# Altium PCB Trofazni_invertor.PcbDoc
Units mm, origin at the board's own origin, x right, y up, seen from the top; angles counter-clockwise.
Board outline 160 x 100 mm, 2 copper layers (Top Layer, Bottom Layer); 57 components, 45 nets, 180 pads, 23 vias.
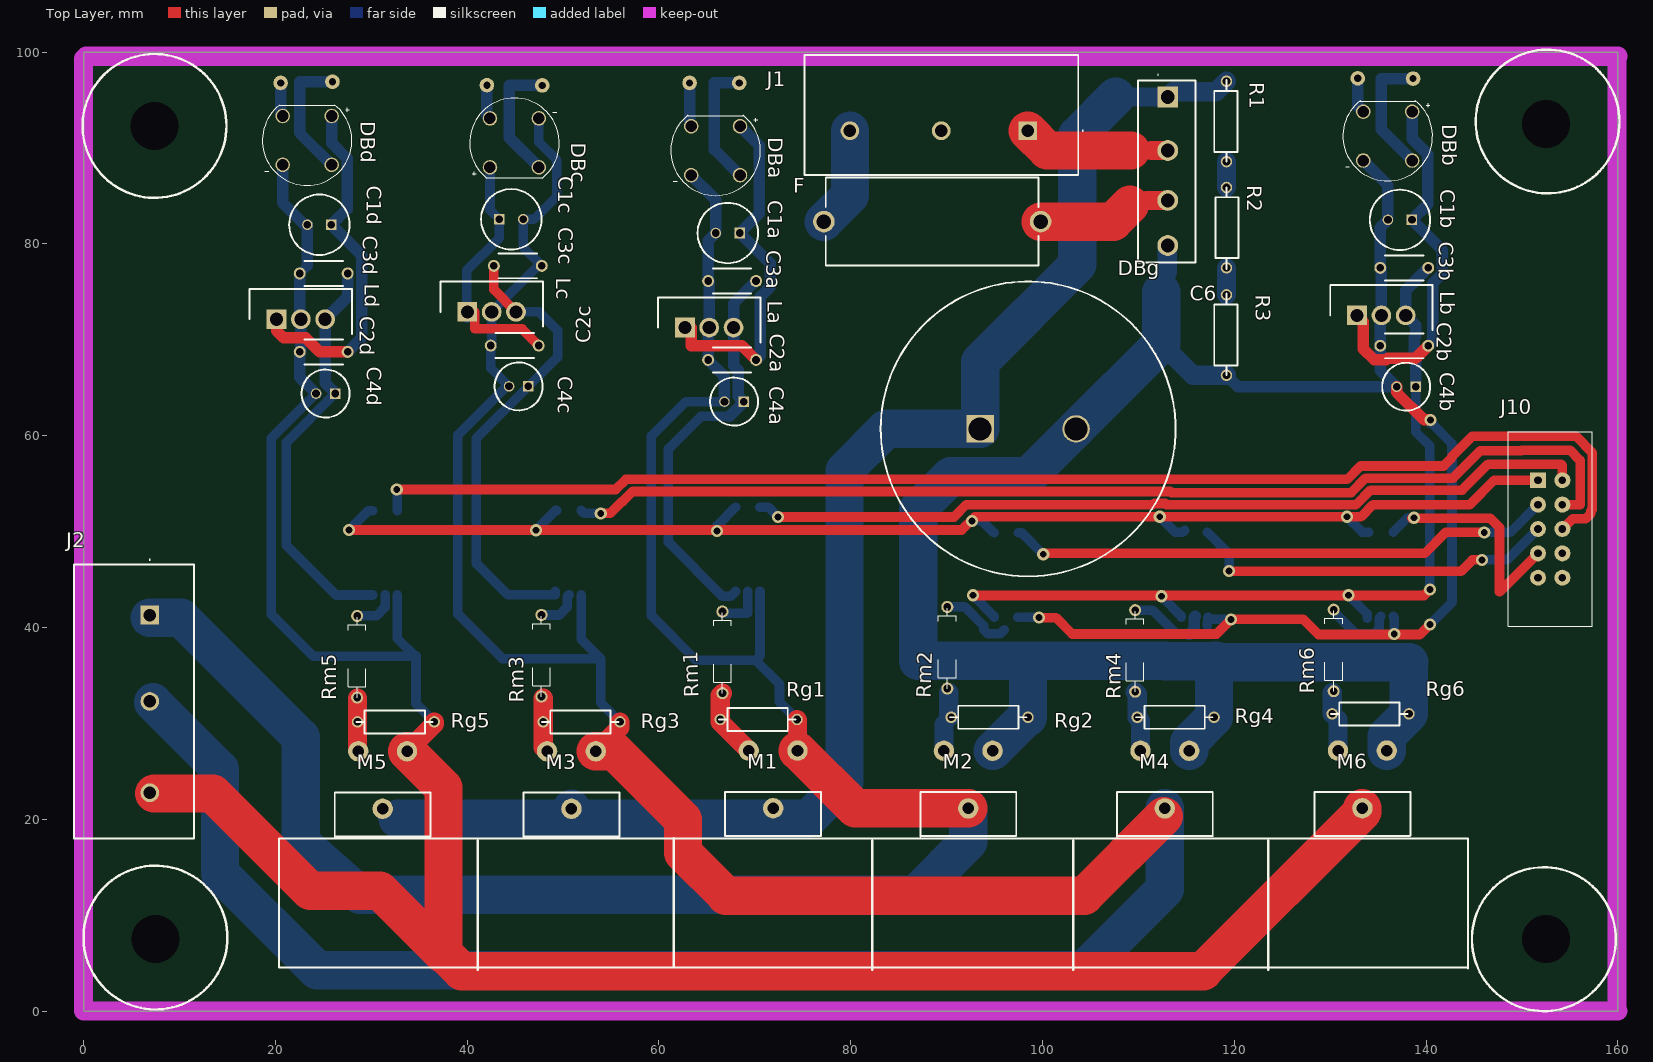
[diagram p0: Top Layer view]
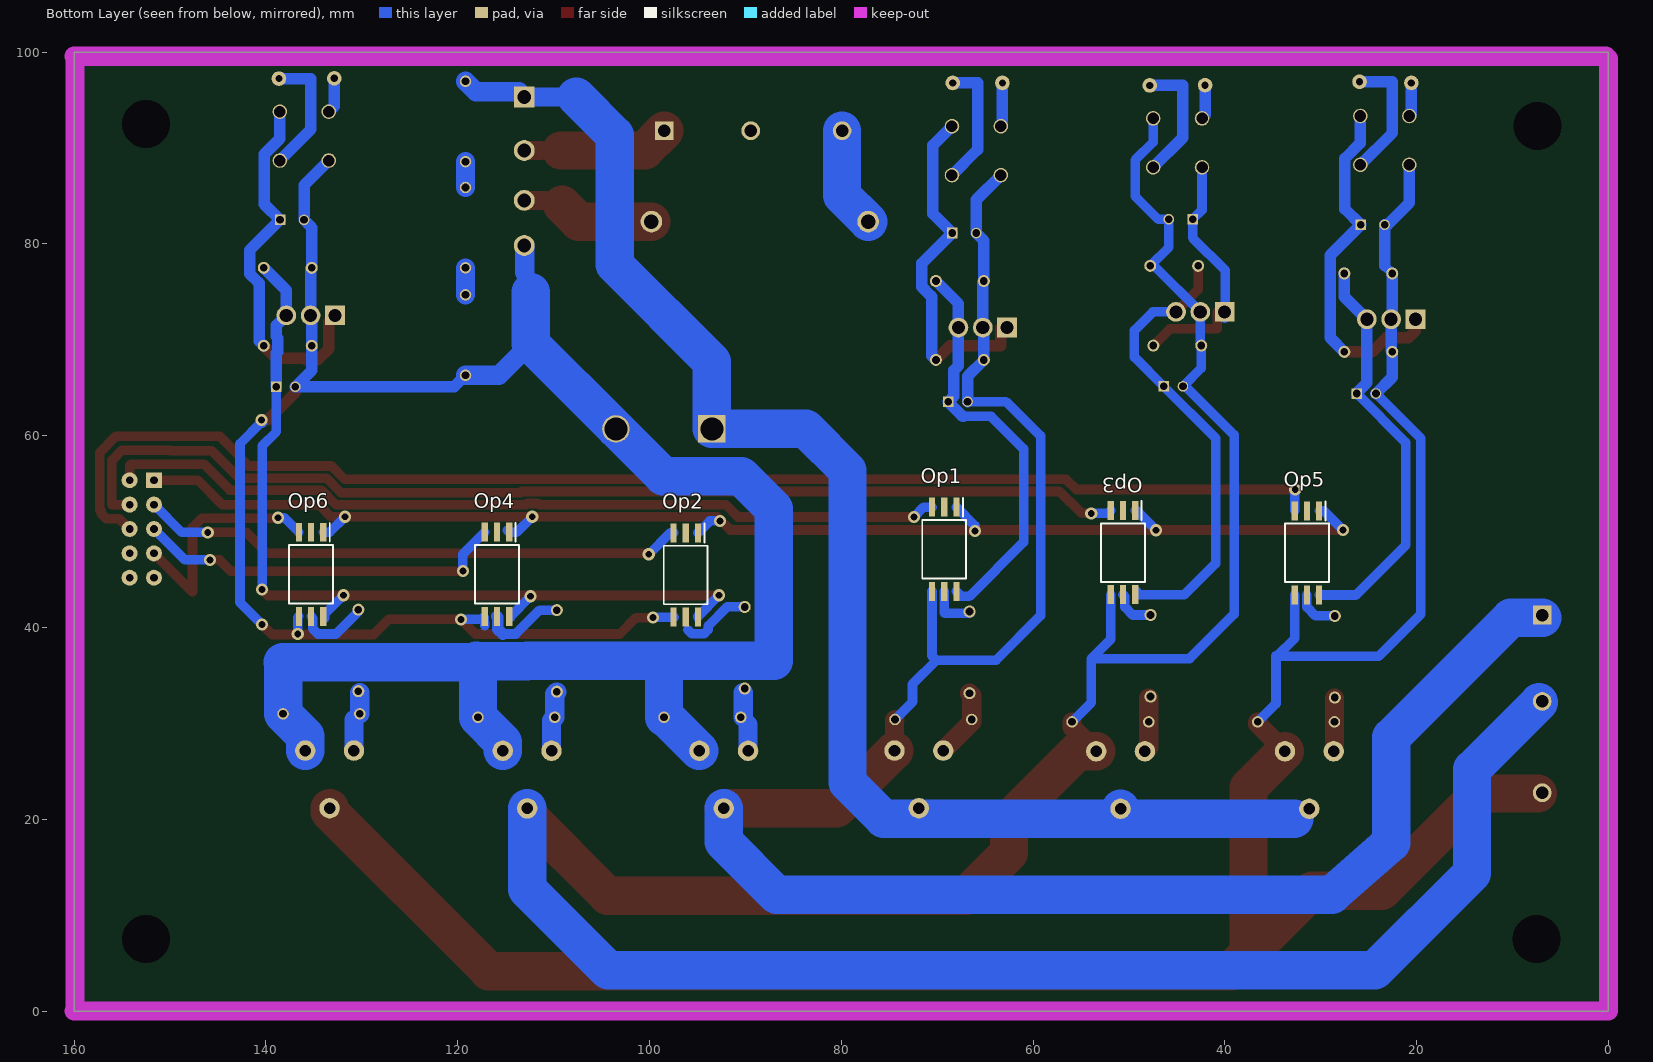
[diagram p1: Bottom Layer view, seen from below]
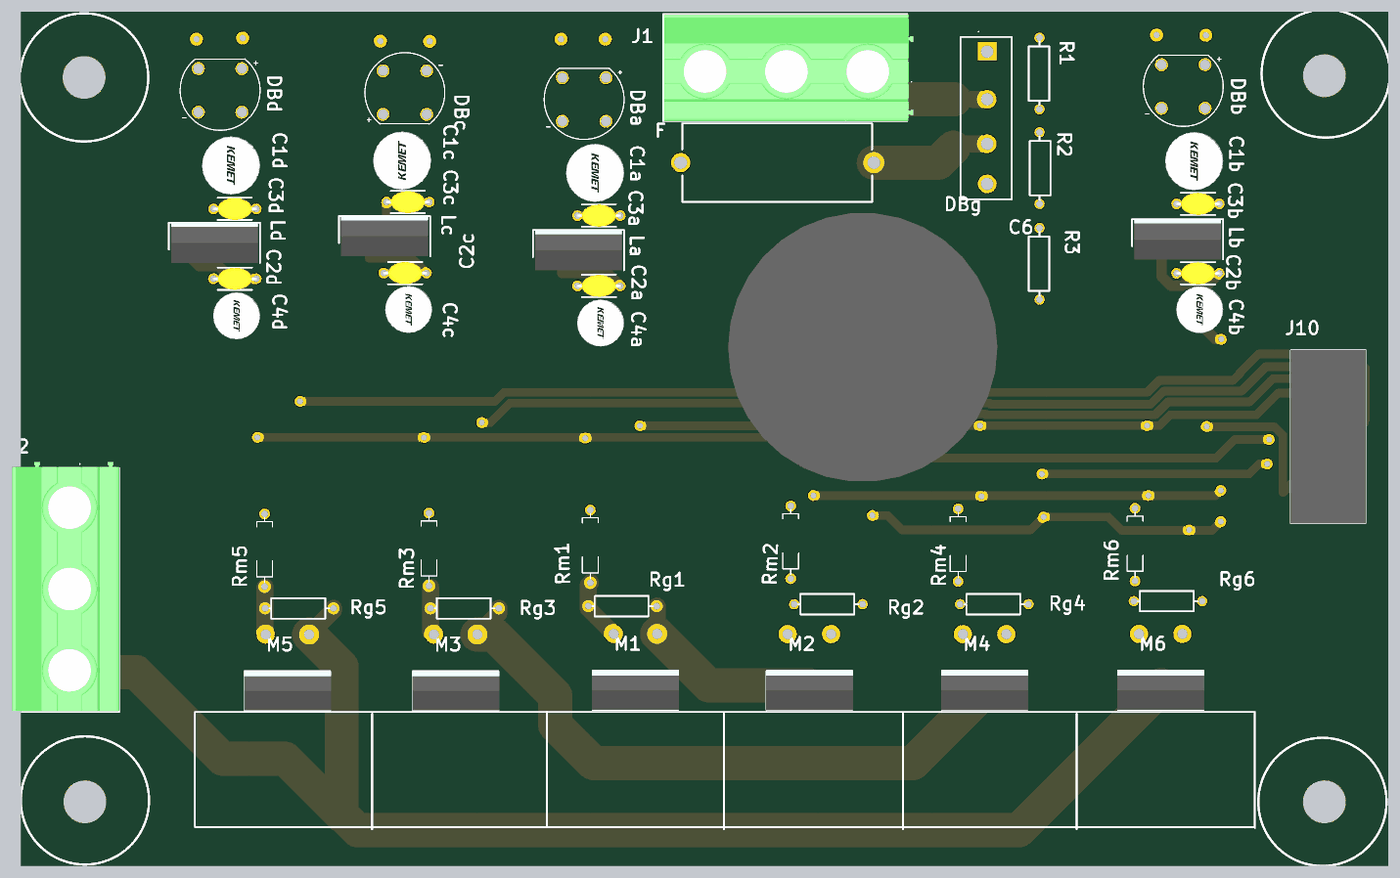
[diagram p2: 3D render of the assembled board from above, using the file's embedded part models]
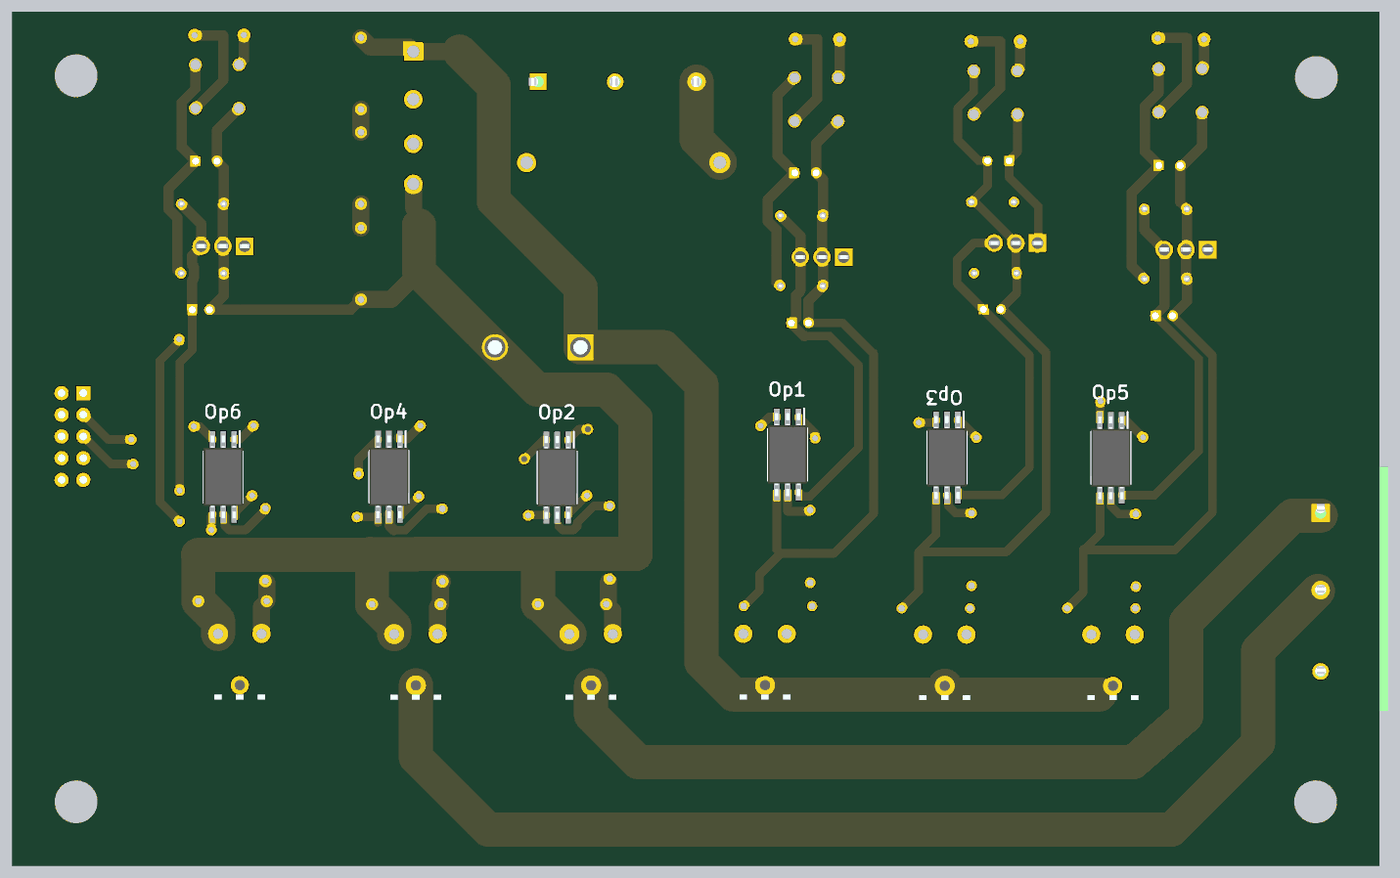
[diagram p3: 3D render of the assembled board from below, using the file's embedded part models]

## Layer stack, top to bottom
Top Solder: solder mask 0.0102, Solder Resist, Dk 3.5
Top Layer: signal copper 0.0356
Dielectric 1: dielectric 0.32, FR-4, Dk 4.8
Bottom Layer: signal copper 0.0356
Bottom Solder: solder mask 0.0102, Solder Resist, Dk 3.5

## Board outline
0,0 160,0 160,100 0,100

## Design rules (kind name [scope] priority, off if disabled: settings)
Clearance [All] p1: gap=0.254 ignorepadtopadclearanceinfootprint=FALSE except(0: Arc-Hole Track-Hole SMDPad-Hole THPad-Hole Via-Hole Fill-Hole Poly-Hole Region-Hole Text-Hole)
PolygonConnect [All] p1: connectstyle=Relief reliefconductorwidth=0.254 reliefentries=4 polygonreliefangle="90 Angle" airgapwidth=0.254
RoutingVias [All] p1: holewidth=0.711 width=1.27 viastyle="Through Hole" minholewidth=0.711 minwidth=1.27 maxholewidth=0.711 maxwidth=1.27
SolderMaskExpansion [All] p1: expansion=0.102
Width [All] p1: maxlimit=4 minlimit=0.99 preferedwidth=4 minimp=50.000000 maximp=50.000000 favimp=50.000000
30 further rules are at their usual default settings.

## Classes and differential pairs
component class Signalni_dio: C1a C1b C1c C1d C2a C2b C2c C2d C3a C3b C3c C3d C4a C4b C4c C4d DBa DBb DBc DBd J10 La Lb Lc Ld Op1 Op2 Op3 Op4 Op5 Op6
component class Energetski_dio: C6 DBg F J1 J2 M1 M2 M3 M4 M5 M6 R1 R2 R3 Rg1 Rg2 Rg3 Rg4 Rg5 Rg6 Rm1 Rm2 Rm3 Rm4 Rm5 Rm6

## Components (designator, comment, footprint, x,y, rotation, side; value= is the part's Value field where it differs from the comment)
C1a "100µF 30V" 20 68.427,81.128 r180 top
C1b "100µF 30V" 20 138.517,82.499 r180 top
C1c "100µF 30V" 20 43.353,82.56 r0 top
C1d "100µF 30V" 20 25.842,81.991 r180 top
C2a "0.1µF 50V" 8 67.626,67.894 r180 top
C2b "0.1µF 50V" 8 137.715,69.367 r180 top
C2c "0.1µF 50V" 8 44.958,69.393 r180 top
C2d "0.1µF 50V" 8 25.041,68.732 r180 top
C3a "0.1µF 50V" 8 67.626,76.124 r180 top
C3b "0.1µF 50V" 8 137.715,77.495 r180 top
C3c "0.1µF 50V" 8 45.284,77.709 r0 top
C3d "0.1µF 50V" 8 25.041,76.911 r180 top
C4a "33µF 30V" CAPPRD200W50D500H1250 68.827,63.551 r180 top
C4b "33µF 30V" CAPPRD200W50D500H1250 138.917,65.1 r180 top
C4c "33µF 30V" CAPPRD200W50D500H1250 46.369,65.136 r180 top
C4d "33µF 30V" CAPPRD200W50D500H1250 26.242,64.389 r180 top
C6 "470µF 400V" 6 93.497,60.706 r0 top
DBa "W04G-E4/51" 11 65.902,89.713 r0 top
DBb "W04G-E4/51" 11 135.992,91.237 r0 top
DBc "W04G-E4/51" 11 44.933,90.526 r180 top
DBd "W04G-E4/51" 11 23.317,90.78 r0 top
DBg "RS407GL-BP" 10 113.055,95.326 r270 top
F "696101000002" 696101000002 88.494,82.321 r0 top
J1 "1714984" 3 98.958,91.796 r180 top
J2 "1714984" 3 6.909,41.803 r270 top
J10 "SBH11-PBPC-D05-ST-BK" 4 151.663,55.347 r270 top
La "LM7818CT" 9 62.707,71.272 r0 top
Lb "LM7818CT" 9 132.797,72.542 r0 top
Lc "LM7818CT" 9 40.026,72.908 r0 top
Ld "LM7818CT" 9 20.122,72.136 r0 top
M1 "STP7NK40Z" 2 71.907,21.158 r0 top
M2 "STP7NK40Z" 2 92.253,21.133 r0 top
M3 "STP7NK40Z" 2 50.876,21.082 r0 top
M4 "STP7NK40Z" 2 112.751,21.133 r0 top
M5 "STP7NK40Z" 2 31.191,21.082 r0 top
M6 "STP7NK40Z" 2 133.35,21.158 r0 top
Op1 "TLP701(TP,F)" 1 69.266,48.152 r270 bottom
Op2 "TLP701(TP,F)" 1 96.215,45.466 r270 bottom
Op3 "TLP701(TP,F)" 1 50.622,47.803 r270 bottom
Op4 "TLP701(TP,F)" 1 115.9,45.542 r270 bottom
Op5 "TLP701(TP,F)" 1 31.445,47.771 r270 bottom
Op6 "TLP701(TP,F)" 1 135.28,45.536 r270 bottom
R1 "33kΩ" 18 119.177,97.079 r270 top
R2 "33kΩ" 18 119.177,77.368 r90 top
R3 "33kΩ" 18 119.177,74.803 r270 top
Rg1 "1kΩ" RESAD1590W60L630D240 66.269,30.404 r0 top
Rg2 "1kΩ" RESAD1590W60L630D240 90.348,30.632 r0 top
Rg3 "1kΩ" RESAD1590W60L630D240 47.803,30.15 r0 top
Rg4 "1kΩ" RESAD1590W60L630D240 109.753,30.632 r0 top
Rg5 "1kΩ" RESAD1590W60L630D240 28.448,30.15 r0 top
Rg6 "1kΩ" RESAD1590W60L630D240 130.073,30.988 r0 top
Rm1 "47Ω" 17 66.624,41.656 r270 top
Rm2 "47Ω" 17 90.068,42.139 r270 top
Rm3 "47Ω" 17 47.752,41.3 r270 top
Rm4 "47Ω" 17 109.652,41.808 r270 top
Rm5 "47Ω" 17 28.524,41.199 r270 top
Rm6 "47Ω" 17 130.353,41.859 r270 top

## Footprints (in the part's own frame and the unit in brackets; to place one, negate y for a bottom-side part, rotate by r counter-clockwise, add the part's x,y. Pads: shape width x height; smd on the part's side, far side on the other; paste and mask are expansions set on the pad)
1 [mm]
  rect 1.975x0.65 smd: 1(-4.388,1.27) 2(-4.388,0) 3(-4.388,-1.27) 4(4.388,-1.27) 5(4.388,0) 6(4.388,1.27)
  silkscreen extent -5.37,-2.29 3.05,2.29, body extent -4.85,-2.29 4.85,2.29, height 4.25
2 [mm]
  round 2.13 hole 1.2: 1(-2.54,6) 2(0,0) 3(2.54,6)
  silkscreen extent -5,-2.92 5,1.7, body extent -5.09,-2.9 5.11,1.7, height 19.4
3 [mm]
  rect 1.95x1.95 hole 1.3: 1(0.508,0)
  round 1.95 hole 1.3: 2(9.52,0) 3(19.04,0)
  silkscreen extent -5.3,-7.9 23.8,4.6, body extent -5.46,-7.9 23.67,4.6, height 22
4 [mm]
  rect 1.665x1.665 hole 0.8: 1(0,0)
  round 1.665 hole 0.8: 2(0,2.54) 3(2.54,0) 4(2.54,2.54) 5(5.08,0) 6(5.08,2.54) 7(7.62,0) 8(7.62,2.54) 9(10.16,0) 10(10.16,2.54)
  silkscreen extent -5.08,-3.13 15.24,5.67, body extent -5.08,-3.13 15.24,5.67, height 8.9
6 [mm]
  rect 2.85x2.85 hole 2.4: 1(0,0)
  round 2.85 hole 2.4: 2(10,0)
  silkscreen extent -10.38,-15.37 20.38,15.37, body extent -10.75,-15.75 20.75,15.75, height 37
8 [mm]
  round 1.25 hole 0.8: 1(-2.5,0) 2(2.5,0)
  silkscreen extent -2,-1.3 2,1.3, body extent -2.7,-1.3 2.7,1.3, height 6.52
9 [mm]
  rect 2.055x2.055 hole 1.37: 1(0,0)
  round 2.055 hole 1.37: 2(2.535,0) 3(5.07,0)
  silkscreen extent -2.8,-1.55 7.87,3.15, body extent -2.55,-1.55 7.61,3.15, height 18.54
10 [mm]
  rect 2.175x2.175 hole 1.45: 1(0,0)
  round 2.175 hole 1.45: 2(10.795,0) 3(5.588,0) 4(15.494,0)
  silkscreen extent -2.37,-3.12 17.28,2.88
11 [mm]
  round 1.518 hole 1.2: AC1(-2.55,2.55) AC2(2.55,-2.55) NEG(-2.55,-2.55) POS(2.55,2.55)
  silkscreen extent -4.67,-4.68 4.67,3.68
17 [mm]
  round 1.258 hole 0.8: 1(0,0) 2(8.509,0)
  silkscreen extent 0.12,-0.92 8.51,0.92
18 [mm]
  round 1.2 hole 0.8: 1(0.127,0) 2(8.509,0)
  silkscreen extent 0,-1.27 8.51,1.14
20 [mm]
  rect 1.1x1.1 hole 0.8: 1(0,0)
  round 1.1 hole 0.8: 2(2.5,0)
  silkscreen extent -1.9,-3.15 4.4,3.15, body extent -2.15,-3.4 4.65,3.4, height 12.5
696101000002 [mm]
  round 2.25 hole 1.5: 1(-11.3,0) 2(11.3,0)
  silkscreen extent -11.1,-4.6 11.1,4.6
CAPPRD200W50D500H1250 [mm]
  rect 1.1x1.1 hole 0.8: 1(0,0)
  round 1.1 hole 0.8: 2(2,0)
  silkscreen extent -1.5,-2.5 3.5,2.5, body extent -1.75,-2.75 3.75,2.75, height 12.48
RESAD1590W60L630D240 [mm]
  round 1.2 hole 0.8: 1(0.127,0) 2(8.128,0)
  silkscreen extent 0,-1.2 7.96,1.2

## Part data
C1a C1b C1c C1d: library part ESK107M035AE3AA, "Capacitor Polarised", Manufacturer_Name=KEMET, Mouser Part Number=80-ESK107M035AE3AA, Arrow Part Number=ESK107M035AE3AA, Arrow Price/Stock=https://www.arrow.com/en/products/esk107m035ae3aa/kemet-corporation, Datasheet Link=https://content.kemet.com/datasheets/KEM_A4004_ESK.pdf, Height=12.5mm, Manufacturer_Part_Number=ESK107M035AE3AA, Mouser Price/Stock=https://www.mouser.co.uk/ProductDetail/KEMET/ESK107M035AE3AA?qs=907G%252Bm7SbTtznNeWXOh3WA%3D%3D
C2a C2b C2c C2d: library part K104Z15Y5VF5TL2, "Capacitor", Manufacturer_Name=Vishay, Mouser Part Number=594-K104Z15Y5VF5TL2, Arrow Part Number=K104Z15Y5VF5TL2, Arrow Price/Stock=https://www.arrow.com/en/products/k104z15y5vf5tl2/vishay?region=nac, Datasheet Link=http://www.mouser.com/ds/2/427/mkseries-205465.pdf, Manufacturer_Part_Number=K104Z15Y5VF5TL2, Mouser Price/Stock=https://www.mouser.co.uk/ProductDetail/Vishay-BC-Components/K104Z15Y5VF5TL2?qs=8fb2TFeI5qG%252BXNQE4bq55w%3D%3D
C3a C3b C3c C3d: library part K104Z15Y5VF5TL2_1, "Capacitor", Arrow Part Number=K104Z15Y5VF5TL2, Manufacturer_Name=Vishay, Mouser Part Number=594-K104Z15Y5VF5TL2, Arrow Price/Stock=https://www.arrow.com/en/products/k104z15y5vf5tl2/vishay?region=nac, Datasheet Link=http://www.mouser.com/ds/2/427/mkseries-205465.pdf, Manufacturer_Part_Number=K104Z15Y5VF5TL2, Mouser Price/Stock=https://www.mouser.co.uk/ProductDetail/Vishay-BC-Components/K104Z15Y5VF5TL2?qs=8fb2TFeI5qG%252BXNQE4bq55w%3D%3D
C4a C4b C4c C4d: library part ESH336M035AC3AA, "Capacitor", Manufacturer_Name=KEMET, Mouser Part Number=80-ESH336M035AC3AA, Arrow Part Number=ESH336M035AC3AA, Arrow Price/Stock=https://www.arrow.com/en/products/esh336m035ac3aa/kemet-corporation?region=nac, Datasheet Link=https://content.kemet.com/datasheets/KEM_A4005_ESH.pdf, Height=12.5mm, Manufacturer_Part_Number=ESH336M035AC3AA, Mouser Price/Stock=https://www.mouser.co.uk/ProductDetail/KEMET/ESH336M035AC3AA?qs=w9hhVRgtvflENp8Xu64Lcw%3D%3D
C6: library part LLG2G471MELB35_1, "Capacitor Polarised", Arrow Part Number=LLG2G471MELB35, Manufacturer_Name=Nichicon, Mouser Part Number=647-LLG2G471MELB35, Arrow Price/Stock=https://www.arrow.com/en/products/llg2g471melb35/nichicon?region=europe, Datasheet Link=http://nichicon-us.com/english/products/pdfs/e-llg.pdf, Height=37mm, Manufacturer_Part_Number=LLG2G471MELB35, Mouser Price/Stock=https://www.mouser.co.uk/ProductDetail/Nichicon/LLG2G471MELB35?qs=4lWw5qRttGISEzjV5TZARQ%3D%3D
DBa DBb DBc DBd: "Bridge Rectifier Single Phase Standard 400 V Through Hole WOG", Package="WOG-4 Vishay Semiconductor Diodes Division", Availability="In Stock", Check_prices=https://www.snapeda.com/parts/W04G-E4/51/Vishay+Semiconductor+Diodes+Division/view-part/?ref=eda, MF=Vishay, MP=W04G-E4/51, Price=None, Purchase-URL=https://pricing.snapeda.com/search/part/W04G-E4/51/?ref=eda, SnapEDA_Link=https://www.snapeda.com/parts/W04G-E4/51/Vishay+Semiconductor+Diodes+Division/view-part/?ref=snap
DBg: "Bridge Rectifier", Manufacturer_Name=MCC, Mouser Part Number=833-RS407GL-BP, Arrow Part Number=RS407GL-BP, Arrow Price/Stock=https://www.arrow.com/en/products/rs407gl-bp/micro-commercial-components?region=nac, Datasheet Link=https://www.mccsemi.com/pdf/Products/RS401GL-RS407GL(RS-4L).pdf, Height=16.3mm, Manufacturer_Part_Number=RS407GL-BP, Mouser Price/Stock=https://www.mouser.co.uk/ProductDetail/Micro-Commercial-Components-MCC/RS407GL-BP?qs=SdqRYZZ9IxAW3J9C4U9fBg%3D%3D
F: "Fuse Block 10 A 250V 1 Circuit Cartridge Through Hole", Package=None, Availability="In Stock", Check_prices=https://www.snapeda.com/parts/696101000002/Wurth+Elektronik/view-part/?ref=eda, MF="Wurth Elektronik", MP=696101000002, Price=None, Purchase-URL=https://pricing.snapeda.com/search/part/696101000002/?ref=eda, SnapEDA_Link=https://www.snapeda.com/parts/696101000002/Wurth+Elektronik/view-part/?ref=snap
J1 J2: "Connector", Manufacturer_Name="Phoenix Contact", Mouser Part Number=651-1714984, Arrow Part Number=1714984, Arrow Price/Stock=https://www.arrow.com/en/products/1714984/phoenix-contact?region=nac, Datasheet Link=https://www.phoenixcontact.com/online/portal/us/?uri=pxc-oc-itemdetail:pid=1714984&library=usen&pcck=P-11-01-05&tab=1&selectedCategory=ALL, Height=21.7mm, Manufacturer_Part_Number=1714984, Mouser Price/Stock=https://www.mouser.co.uk/ProductDetail/Phoenix-Contact/1714984?qs=cyzODkzcbwBLTTPxtXl6gQ%3D%3D
J10: "Connector", Manufacturer_Name=Sullins, Datasheet Link=https://s3.amazonaws.com/catalogspreads-pdf/PAGE122%20.100%20SBH11%20SERIES%20MALE%20BOX%20HDR%20ST%20RA%20SMT.pdf, Height=8.8mm, Manufacturer_Part_Number=SBH11-PBPC-D05-ST-BK
La Lb Lc Ld: "Integrated Circuit", Manufacturer_Name=onsemi, Mouser Part Number=512-LM7818CT, Arrow Part Number=LM7818CT, Arrow Price/Stock=https://www.arrow.com/en/products/lm7818ct/on-semiconductor, Datasheet Link=https://componentsearchengine.com/Datasheets/2/LM7818CT.pdf, Height=4.7mm, Manufacturer_Part_Number=LM7818CT, Mouser Price/Stock=https://www.mouser.co.uk/ProductDetail/ON-Semiconductor-Fairchild/LM7818CT?qs=VOMQJJE%252BBNlJ%252BsI8cCErUA%3D%3D
M1 M2 M3 M4 M5 M6: library part STP7NK40ZFP, "MOSFET (N-Channel)", Manufacturer_Name=STMicroelectronics, Mouser Part Number=511-STP7NK40ZFP, Arrow Part Number=STP7NK40ZFP, Arrow Price/Stock=https://www.arrow.com/en/products/stp7nk40zfp/stmicroelectronics, Datasheet Link=http://www.st.com/web/en/resource/technical/document/datasheet/CD00003040.pdf, Height=4.6mm, Manufacturer_Part_Number=STP7NK40ZFP, Mouser Price/Stock=https://www.mouser.com/Search/Refine.aspx?Keyword=511-STP7NK40ZFP
Op1 Op2 Op3 Op4 Op5 Op6: library part TLP701_TP_, "Phototransistor", Manufacturer_Name=Toshiba, Manufacturer_Part_Number=TLP701(TP), Datasheet Link=https://toshiba.semicon-storage.com/info/docget.jsp?did=1642&prodName=TLP701, Height=4.25mm
R1 R2 R3: library part CFR-50JB-52-33K, "Resistor", Manufacturer_Name=KEMET, Mouser Part Number=603-CFR-50JB-52-33K, Arrow Part Number=CFR-50JB-52-33K, Arrow Price/Stock=https://www.arrow.com/en/products/cfr-50jb-52-33k/yageo?region=nac, Datasheet Link=https://datasheet.datasheetarchive.com/originals/distributors/Datasheets_SAMA/cf5c7c7b14e59499e9125003e6ee5ce2.pdf, Manufacturer_Part_Number=CFR-50JB-52-33K, Mouser Price/Stock=https://www.mouser.co.uk/ProductDetail/YAGEO/CFR-50JB-52-33K?qs=oypCK0zG3245HXmmN0J37w%3D%3D
Rg1 Rg2 Rg3 Rg4 Rg5 Rg6: library part CFR-25JB-52-1K, "Resistor", Manufacturer_Name=KEMET, Mouser Part Number=N/A, Arrow Part Number=CFR-25JB-52-1K, Arrow Price/Stock=https://www.arrow.com/en/products/cfr-25jb-52-1k/yageo, Datasheet Link="http://www.mouser.com/datasheet/2/447/Yageo LR_CFR_2013-595289.pdf", Manufacturer_Part_Number=CFR-25JB-52-1K, Mouser Price/Stock=https://www.mouser.co.uk/ProductDetail/Yageo/CFR-25JB-52-1K/?qs=oypCK0zG326Dzm6bUFS4DQ%3D%3D
Rm1 Rm2 Rm4 Rm5 Rm6: library part 2-1623928-5, "470 Ohms ±5% 0.25W, 1/4W Through Hole Resistor Axial - Carbon Film", Package=None, Power_Rating=".25 W", Resistance=470, Tolerance=5%, Voltage_Rating="200 V", Availability="In Stock", Check_prices=https://www.snapeda.com/parts/2-1623928-5/TE+Connectivity/view-part/?ref=eda, EU_RoHS_Compliance=Compliant, MF="TE Connectivity", MP=2-1623928-5, Price=None, SnapEDA_Link=https://www.snapeda.com/parts/2-1623928-5/TE+Connectivity/view-part/?ref=snap
Rm3: library part 2-1623928-5, "470 Ohms ±5% 0.25W, 1/4W Through Hole Resistor Axial - Carbon Film", Package=None, Power_Rating=".25 W", Resistance=47, Tolerance=5%, Voltage_Rating="200 V", Availability="In Stock", Check_prices=https://www.snapeda.com/parts/2-1623928-5/TE+Connectivity/view-part/?ref=eda, EU_RoHS_Compliance=Compliant, MF="TE Connectivity", MP=2-1623928-5, Price=None, SnapEDA_Link=https://www.snapeda.com/parts/2-1623928-5/TE+Connectivity/view-part/?ref=snap

## Free pads (board coordinates)
  round 1.524 hole 5: 2(7.405,92.297) 2(7.5,7.5) 2(152.5,7.5) 2(152.5,92.5)
  round 1.524 hole 0.762: 3(20.549,96.774) 4(25.959,96.901) 5(42.062,96.545) 6(47.828,96.52) 7(63.195,96.774) 8(68.377,96.774) 9(132.867,97.257) 10(138.633,97.231)

## Via types
v1: diameter 1.27, hole 0.711, Top Layer to Bottom Layer, 23 vias

## Nets (pads, with @x,y where several pads share a name; then routed paths per layer and width w, separated by ;. In a path a pad name is that pad's centre, name@x,y a point inside that pad or via, vN(x,y) a via of type N, cw(c..) or ccw(c..) an arc to the next point about the centre after c; other vN are vias at no path point)
+UDC: C6.1 DBg.1 M1.2 M3.2 M5.2 R1.1 | length 149.6
  Bottom Layer w2: 107.645,95.326 DBg.1 ; DBg.1@113.589,95.86 118.085,95.86 R1.1
  Bottom Layer w4: 32.766,20.066 M3.2@50.876,20.066 ; M3.2 M3.2@50.876,20.066 ; 107.645,95.326 103.632,91.313 103.632,77.851 93.497,67.716 C6.1 83.693,60.706 79.35,56.363 79.35,23.825 75.59,20.066 M3.2@50.876,20.066
-UDC: C1b.2 C2b.2 C3b.2 C4b.2 C6.2 DBb.NEG DBg.4 Lb.2 M2.3 M4.3 M6.3 Op2.4 Op4.4 Op6.4 R3.2 Rg2.2 Rg4.2 Rg6.2 | length 270.7
  Top Layer w1: v1(99.619,41.021) 101.397,41.021 103.099,39.319 118.135,39.319 v1(119.659,40.843) 127.203,40.843 128.778,39.268 139.344,39.268 v1(140.386,40.31)
  Top Layer w1.2: C4b.2 136.917,64.505 139.776,61.646 v1(140.437,61.646)
  Bottom Layer w1: Op2.4@97.434,41.078 Op2.4 v1@99.384,41.078 ; Op4.4@117.163,40.197 117.163,40.502 117.254,40.593 117.254,41.07 117.481,40.843 v1(119.659,40.843) ; Op6.4 136.677,41.021 v1(136.677,39.319) ; v1(140.386,40.31) 142.697,42.621 142.697,59.157 v1@140.437,61.417
  Bottom Layer w1.2: DBg.4@113.005,79.781 DBg.4 ; R3.2 120.371,65.1 C4b.2 135.215,66.802 C2b.2 135.215,72.426 Lb.2 135.332,77.379 C3b.2 135.215,81.698 C1b.2 136.017,86.112 DBb.NEG ; v1@140.437,61.417 v1(140.437,61.646)
  Bottom Layer w2: 112.391,69.6 115.697,66.294 R3.2 ; 113.005,77.013 DBg.4@113.005,79.781
  Bottom Layer w4: M2.3 98.292,30.632 Rg2.2 98.476,36.386 98.603,36.513 ; 112.391,74.977 112.391,69.6 C6.2 98.544,55.753 90.424,55.753 87.046,52.375 87.046,36.5 87.059,36.513 98.603,36.513 ; M4.3 115.291,28.042 Rg4.2 117.881,36.335 118.005,36.459 ; 118.059,36.386 138.239,36.386 138.201,36.348 Rg6.2 135.89,28.677 M6.3 ; 118.059,36.513 118.005,36.459 ; 98.603,36.513 112.715,36.513 112.769,36.459 118.005,36.459
E1: C1a.2 C2a.2 C3a.2 C4a.2 DBa.NEG J2.1 La.2 M1.3 M2.2 Op1.4 Rg1.2 | length 214.7
  Top Layer w2: Rg1.2 74.447,30.353 M1.3
  Top Layer w4: M1.3 80.473,21.133 M2.2
  Bottom Layer w1: C4a.2 62.84,63.551 59.284,59.995 59.207,59.995 59.207,41.224 63.856,36.576 70.079,36.576 ; Op1.4 70.536,37.033 70.079,36.576 ; Rg1.2 72.568,32.233 72.568,34.087 70.079,36.576
  Bottom Layer w1.2: DBa.NEG 65.927,84.588 C1a.2 65.126,80.326 C3a.2 65.242,76.007 La.2 65.126,71.156 C2a.2 66.827,66.193 C4a.2
  Bottom Layer w4: J2.1@6.909,40.996 10.185,40.996 22.631,28.55 22.631,17.551 28.829,12.141 86.741,12.141 92.253,17.653 M2.2
E3: C1c.2 C2c.2 C3c.2 C4c.2 DBc.NEG J2.2 Lc.2 M3.3 M4.2 Op3.4 Rg3.2 | length 303.1
  Top Layer w2: M3.3 55.931,29.597 Rg3.2
  Top Layer w4: M3.3 55.366,27.082 62.509,19.939 62.509,16.51 66.98,12.04 104.369,12.04 M4.2@112.649,20.32
  Bottom Layer w1: DBc.NEG 47.483,90.592 49.352,88.722 49.352,84.963 46.949,82.56 C1c.2 45.853,79.639 C3c.2 47.361,77.709 Lc.2 42.561,69.496 C2c.2 42.458,67.047 C4c.2 44.104,65.136 39.04,60.071 39.04,41.402 43.688,36.754 53.924,36.754 ; Op3.4 51.892,38.786 53.924,36.754 ; Rg3.2 53.924,32.156 53.924,36.754
  Bottom Layer w4: J2.2@7.239,32.182 14.224,25.197 14.224,14.376 24.359,4.242 104.292,4.242 112.751,12.7 M4.2
E5: C1d.2 C2d.2 C3d.2 C4d.2 DBd.NEG J2.3 Ld.2 M5.3 M6.2 Op5.4 Rg5.2 | length 251.9
  Top Layer w2: M5.3 36.576,29.927 Rg5.2
  Top Layer w4: J2.3@7.341,22.682 13.487,22.682 23.622,12.548 30.912,12.548 37.541,5.918 37.541,6.045 ; M5.3 37.541,23.272 37.541,6.045 ; 36.652,6.934 37.541,6.045 ; M6.2 133.35,20.777 116.738,4.166 39.421,4.166 37.541,6.045
  Bottom Layer w1: C3d.2 23.342,77.713 ; C4d.2 19.569,59.715 19.569,41.391 23.978,36.982 34.595,36.982 ; Op5.4 32.715,38.862 34.595,36.982 ; Rg5.2 34.671,32.055 34.671,37.059 34.595,36.982
  Bottom Layer w1.2: DBd.NEG 20.767,84.262 C1d.2@23.038,81.991 ; C3d.2 22.541,72.253 Ld.2 22.657,68.849 C2d.2 22.541,66.091 C4d.2 ; 23.342,77.713 C1d.2
G1: Op1.5 Rm1.1 | length 5
  Bottom Layer w1: Rm1.1 66.624,41.495 69.215,41.495 69.266,41.546 Op1.5
G2: Op2.5 Rm2.1 | length 7.5
  Bottom Layer w1: Rm2.1 91.897,42.139 93.866,40.17 93.866,39.778 94.308,39.336 95.583,39.336 96.024,39.778
G3: Op3.5 Rm3.1 | length 4.4
  Bottom Layer w1: Rm3.1 49.617,41.3 50.431,42.115 50.431,43.224 Op3.5
G4: Op4.5 Rm4.1 | length 8.8
  Bottom Layer w1: Rm4.1 111.456,41.808 113.951,39.313 115.309,39.313
  Bottom Layer w1.2: 115.309,39.313 115.809,39.813 115.809,41.063 Op4.5
G5: Op5.5 Rm5.1 | length 4.6
  Bottom Layer w1: Rm5.1 30.531,41.199 31.445,42.113 Op5.5
G6: Op6.5 Rm6.1 | length 7.5
  Bottom Layer w1: Rm6.1 130.353,41.656 132.69,39.319 134.56,39.319 135.089,39.848 135.089,40.957 Op6.5
K1: J10.2 Op1.3 | length 88.1
  Top Layer w1: v1(72.423,51.519) 90.762,51.519 92.034,52.791 111.507,52.791 111.642,52.926 112.793,52.926 112.928,52.791 132.678,52.791 134.21,54.323 143.756,54.323 146.467,57.033 154.066,57.033 154.203,56.896 J10.2
  Bottom Layer w1: Op1.3 71.402,52.54 v1(72.423,51.519)
K2: J10.3 Op2.3 | length 57.3
  Top Layer w1: v1@99.974,47.727 139.852,47.727 142.037,49.911 v1(146.05,49.911)
  Bottom Layer w1: Op2.3 97.847,49.854 v1(100.076,47.625) ; v1(146.05,49.911) 148.768,49.911 J10.3
K3: J10.4 Op3.3 | length 114
  Top Layer w1: v1(53.924,51.892) 54.915,51.892 56.159,53.137 56.21,53.137 57.253,54.18 113.312,54.18 113.447,54.045 132.159,54.045 133.691,55.577 142.8,55.577 145.669,58.445 149.937,58.445 149.979,58.487 155,58.487 156.058,57.429 156.058,52.807 J10.4
  Bottom Layer w1: Op3.3 52.191,51.892 v1(53.924,51.892)
K4: J10.5 Op4.3 | length 39
  Top Layer w1: v1(119.456,45.872) 143.662,45.872 144.831,47.041 v1(145.821,47.041)
  Bottom Layer w1: Op4.3 119.456,47.644 v1(119.456,45.872) ; v1(145.821,47.041) 148.438,47.041 J10.5
K5: J10.6 Op5.3 | length 140
  Top Layer w1: v1(32.664,54.381) 55.49,54.381 56.543,55.434 131.774,55.434 133.171,56.831 141.819,56.831 142.597,57.608 142.597,57.71 144.828,59.941 155.602,59.941 157.312,58.232 157.312,52.287 157.175,52.15 157.175,51.867 156.66,51.353 155.289,51.353 J10.6
  Bottom Layer w1: v1(32.664,54.381) 32.715,54.331 Op5.3
K6: J10.7 Op6.3 | length 24.7
  Top Layer w1: v1@138.522,51.4 146.669,51.4 147.65,50.419 147.65,43.713 J10.7
  Bottom Layer w1: Op6.3 138.061,51.435 v1(138.735,51.435)
NetC1a_1: C1a.1 C2a.1 DBa.POS La.1 | length 37.9
  Top Layer w1.2: La.1 63.361,71.272 63.361,69.391 68.629,69.391 C2a.1
  Bottom Layer w1.2: DBa.POS 70.434,90.281 70.434,83.135 C1a.1 71.605,77.95 71.605,75.511 70.738,74.645 70.703,74.645 70.561,74.503 70.561,68.33 C2a.1
NetC1b_1: C1b.1 C2b.1 DBb.POS Lb.1 | length 39.3
  Top Layer w1.2: Lb.1 133.45,71.889 133.45,69.041 134.602,67.888 135.828,67.888 136.011,68.072 138.92,68.072 C2b.1
  Bottom Layer w1.2: DBb.POS 138.542,90.968 140.155,89.355 140.155,84.137 C1b.1 141.694,79.322 141.694,76.883 140.828,76.016 140.792,76.016 140.665,75.889 140.665,69.818 C2b.1
NetC1c_1: C1c.1 C2c.1 DBc.POS Lc.1 | length 27.5
  Top Layer w1: Lc.1 40.779,72.908 40.779,71.126 45.724,71.126 C2c.1
  Bottom Layer w1: Lc.1@40.026,72.237 Lc.1 39.954,72.98 39.954,77.216 43.353,80.615 C1c.1 42.383,83.531 DBc.POS
NetC1d_1: C1d.1 C2d.1 DBd.POS Ld.1 | length 37.4
  Top Layer w1.2: Ld.1 20.122,70.948 20.859,70.211 23.153,70.211 24.632,68.732 C2d.1
  Bottom Layer w1.2: DBd.POS 25.867,90.511 27.48,88.898 27.48,83.629 C1d.1 29.02,78.814 29.02,70.211 C2d.1
NetDBg_2: DBg.2 F.2 | length 12.2
  Top Layer w2: 110.871,84.531 DBg.2
  Top Layer w4: F.2 107.366,82.321 109.118,84.074
NetDBg_3: DBg.3 J1.1 | length 13.3
  Top Layer w2: 111.354,89.738 DBg.3
  Top Layer w4: J1.1 100.508,89.738 109.195,89.738
NetF_1: F.1 J1.3 | length 10.6
  Bottom Layer w4: F.1 79.918,85.046 J1.3
NetM1_1: M1.1 Rg1.1 Rm1.2 | length 7.8
  Top Layer w1: Rg1.1@66.396,30.13 Rg1.1
  Top Layer w2: Rg1.1@66.396,30.13 M1.1 ; Rg1.1 66.396,32.918 Rm1.2
  Bottom Layer w1: M1.1@69.012,27.514 M1.1
NetM2_1: M2.1 Rg2.1 Rm2.2 | length 7.2
  Bottom Layer w1.2: M2.1@89.535,27.311 M2.1 ; 89.713,29.87 Rg2.1 ; Rm2.2 Rm2.2@90.475,33.223
  Bottom Layer w2: M2.1 89.713,29.87 ; Rg2.1@90.221,30.632 Rm2.2@90.221,33.223
NetM3_1: M3.1 Rg3.1 Rm3.2 | length 6.4
  Top Layer w1: Rm3.2 Rm3.2@47.93,32.614 ; M3.1@47.93,27.488 M3.1
  Top Layer w2: M3.1@47.93,27.488 Rg3.1 Rm3.2@47.93,32.614
  Bottom Layer w1: M3.1@48.031,27.387 M3.1
NetM4_1: M4.1 Rg4.1 Rm4.2 | length 6.4
  Bottom Layer w2: Rm4.2@109.652,33.259 109.693,33.259 109.88,33.071 Rg4.1 110.211,30.302 M4.1
NetM5_1: M5.1 Rg5.1 Rm5.2 | length 5.7
  Top Layer w1: Rm5.2 Rm5.2@28.575,32.639 ; M5.1@28.575,27.158 M5.1
  Top Layer w2: M5.1@28.575,27.158 Rg5.1 Rm5.2@28.575,32.639
NetM6_1: M6.1 Rg6.1 Rm6.2 | length 6.5
  Bottom Layer w1: Rg6.1 130.81,30.378 ; Rm6.2@130.2,33.198 Rm6.2
  Bottom Layer w2: Rg6.1 Rm6.2@130.2,33.198 ; M6.1 130.81,30.378
NetR1_2: R1.2 R2.2 | length 2.7
  Bottom Layer w2: R2.2 R1.2
NetR2_1: R2.1 R3.1 | length 2.8
  Bottom Layer w2: R3.1 R2.1
t1: DBa.AC2 pad.8 | length 13.3
  Bottom Layer w1.2: pad.8 65.786,96.774 65.786,89.829 DBa.AC2
t2: DBa.AC1 pad.7 | length 4.6
  Bottom Layer w1.2: pad.7 63.195,92.42 DBa.AC1
t3: DBb.AC2 pad.10 | length 13.2
  Bottom Layer w1.2: DBb.AC2 135.306,91.923 135.306,97.231 pad.10
t4: DBb.AC1 pad.9 | length 3.7
  Bottom Layer w1.2: pad.9 132.867,94.361 DBb.AC1
t5: DBc.AC2 pad.5 | length 3.6
  Bottom Layer w1.2: pad.5 42.062,93.396 DBc.AC2
t6: DBc.AC1 pad.6 | length 13.3
  Bottom Layer w1.2: DBc.AC1 44.399,91.059 44.399,96.52 pad.6
t7: DBd.AC2 pad.4 | length 13.5
  Bottom Layer w1.2: DBd.AC2 22.53,91.567 22.53,96.901 pad.4
t8: DBd.AC1 pad.3 | length 3.5
  Bottom Layer w1.2: pad.3 20.549,93.548 DBd.AC1
VCC: J10.1 Op1.1 Op2.1 Op3.1 Op4.1 Op5.1 Op6.1 | length 145
  Top Layer w1: v1(27.686,50.165) 91.567,50.165 92.939,51.537 v1(112.217,51.537) v1(131.75,51.537) 133.198,51.537 134.468,52.807 144.551,52.807 147.091,55.347 J10.1
  Top Layer w1.2: J10.1@151.663,55.192 J10.1
  Bottom Layer w1: v1(27.686,50.165) 29.68,52.159 Op5.1 ; v1(47.168,50.14) 49.219,52.191 Op3.1 ; v1(66.04,50.063) 66.04,50.584 Op1.1 ; v1(92.634,51.105) 93.694,51.105 Op2.1 ; v1(112.217,51.537) 113.824,49.93 Op4.1 Op4.1@114.821,50.121 ; v1(131.75,51.537) 133.362,49.924 Op6.1
VCC1: C3a.1 C4a.1 La.3 Op1.6 | length 43.2
  Bottom Layer w1: 67.285,62.008 64.37,62.008 60.985,58.623 60.985,48.895 66.643,43.237 67.469,43.237 Op1.6 ; 67.373,62.097 67.43,62.097
  Bottom Layer w1.2: 67.285,62.008 67.373,62.097 ; 67.43,62.097 68.827,63.495 C4a.1 68.281,64.097 68.281,66.795 67.777,67.299 La.3 67.777,73.775 C3a.1
VCC2: C3b.1 C4b.1 Lb.3 Op2.6 Op4.6 Op6.6 | length 93
  Top Layer w1: v1@92.786,43.332 139.776,43.332 v1(140.386,43.942)
  Bottom Layer w1: v1(92.735,43.358) 94.945,41.148 Op2.6 ; v1(112.395,43.256) 114.455,41.196 Op4.6@114.455,41.063 ; v1(131.902,43.358) 133.835,41.425 Op6.6@133.835,40.957 ; C4b.1 138.917,60.397 140.386,58.928 v1(140.386,43.942)
  Bottom Layer w1.2: C4b.1 138.917,68.574 138.736,68.755 138.736,70.161 138.917,70.341 138.917,71.492 Lb.3 137.867,75.147 C3b.1
VCC3: C3c.1 C4c.1 Lc.3 Op3.6 | length 48.6
  Top Layer w1: C3c.1 42.784,75.22 Lc.3
  Bottom Layer w1: Lc.3 47.488,72.908 49.433,70.963 49.433,68.199 C4c.1 40.97,59.737 40.97,46.66 44.215,43.415 49.177,43.415 Op3.6@49.177,43.743
VCC5: C3d.1 C4d.1 Ld.3 Op5.6 | length 43
  Bottom Layer w1: C4d.1 21.158,59.305 21.158,48.565 26.34,43.383 Op5.6
  Bottom Layer w1.2: C4d.1 26.242,64.445 25.192,65.495 Ld.3 27.541,74.484 C3d.1
pads on no net: J1.2 J10.8 J10.9 J10.10 Op1.2 Op2.2 Op3.2 Op4.2 Op5.2 Op6.2

## Keep-outs
Keep-Out Layer:
  lines w2: 0,99.314 0,0 160,0 ; 0.254,99.568 160,99.568 ; 159.898,0 159.898,99.568

## Silkscreen, mask and mechanical layers (free items; w line width, h text height)
Top Overlay:
  circle w0.254: c152.273,7.493 r7.5
  circle w0.254: c7.5,7.664 r7.5
  circle w0.254: c152.661,92.754 r7.5
  circle w0.254: c7.405,92.297 r7.5
  lines w0.2: 144.362,4.445 144.362,17.907 ; 144.362,4.547 20.362,4.547 20.362,18.009 144.362,18.009
  lines w0.254: 41.097,4.318 41.097,17.78 ; 61.544,4.572 61.544,18.034 ; 82.245,4.318 82.245,17.78 ; 103.2,4.318 103.2,17.78 ; 123.52,4.318 123.52,17.78